# Altium PCB Music_Player.PcbDoc
Units mm, origin at the board's own origin, x right, y up, seen from the top; angles counter-clockwise.
Board outline 47 x 36.5 mm, 2 copper layers (Top Layer, Bottom Layer), stack 1.4 mm thick; 36 components, 24 nets, 164 pads, 63 vias.
Unrouted connection lines stored in the file: 41.
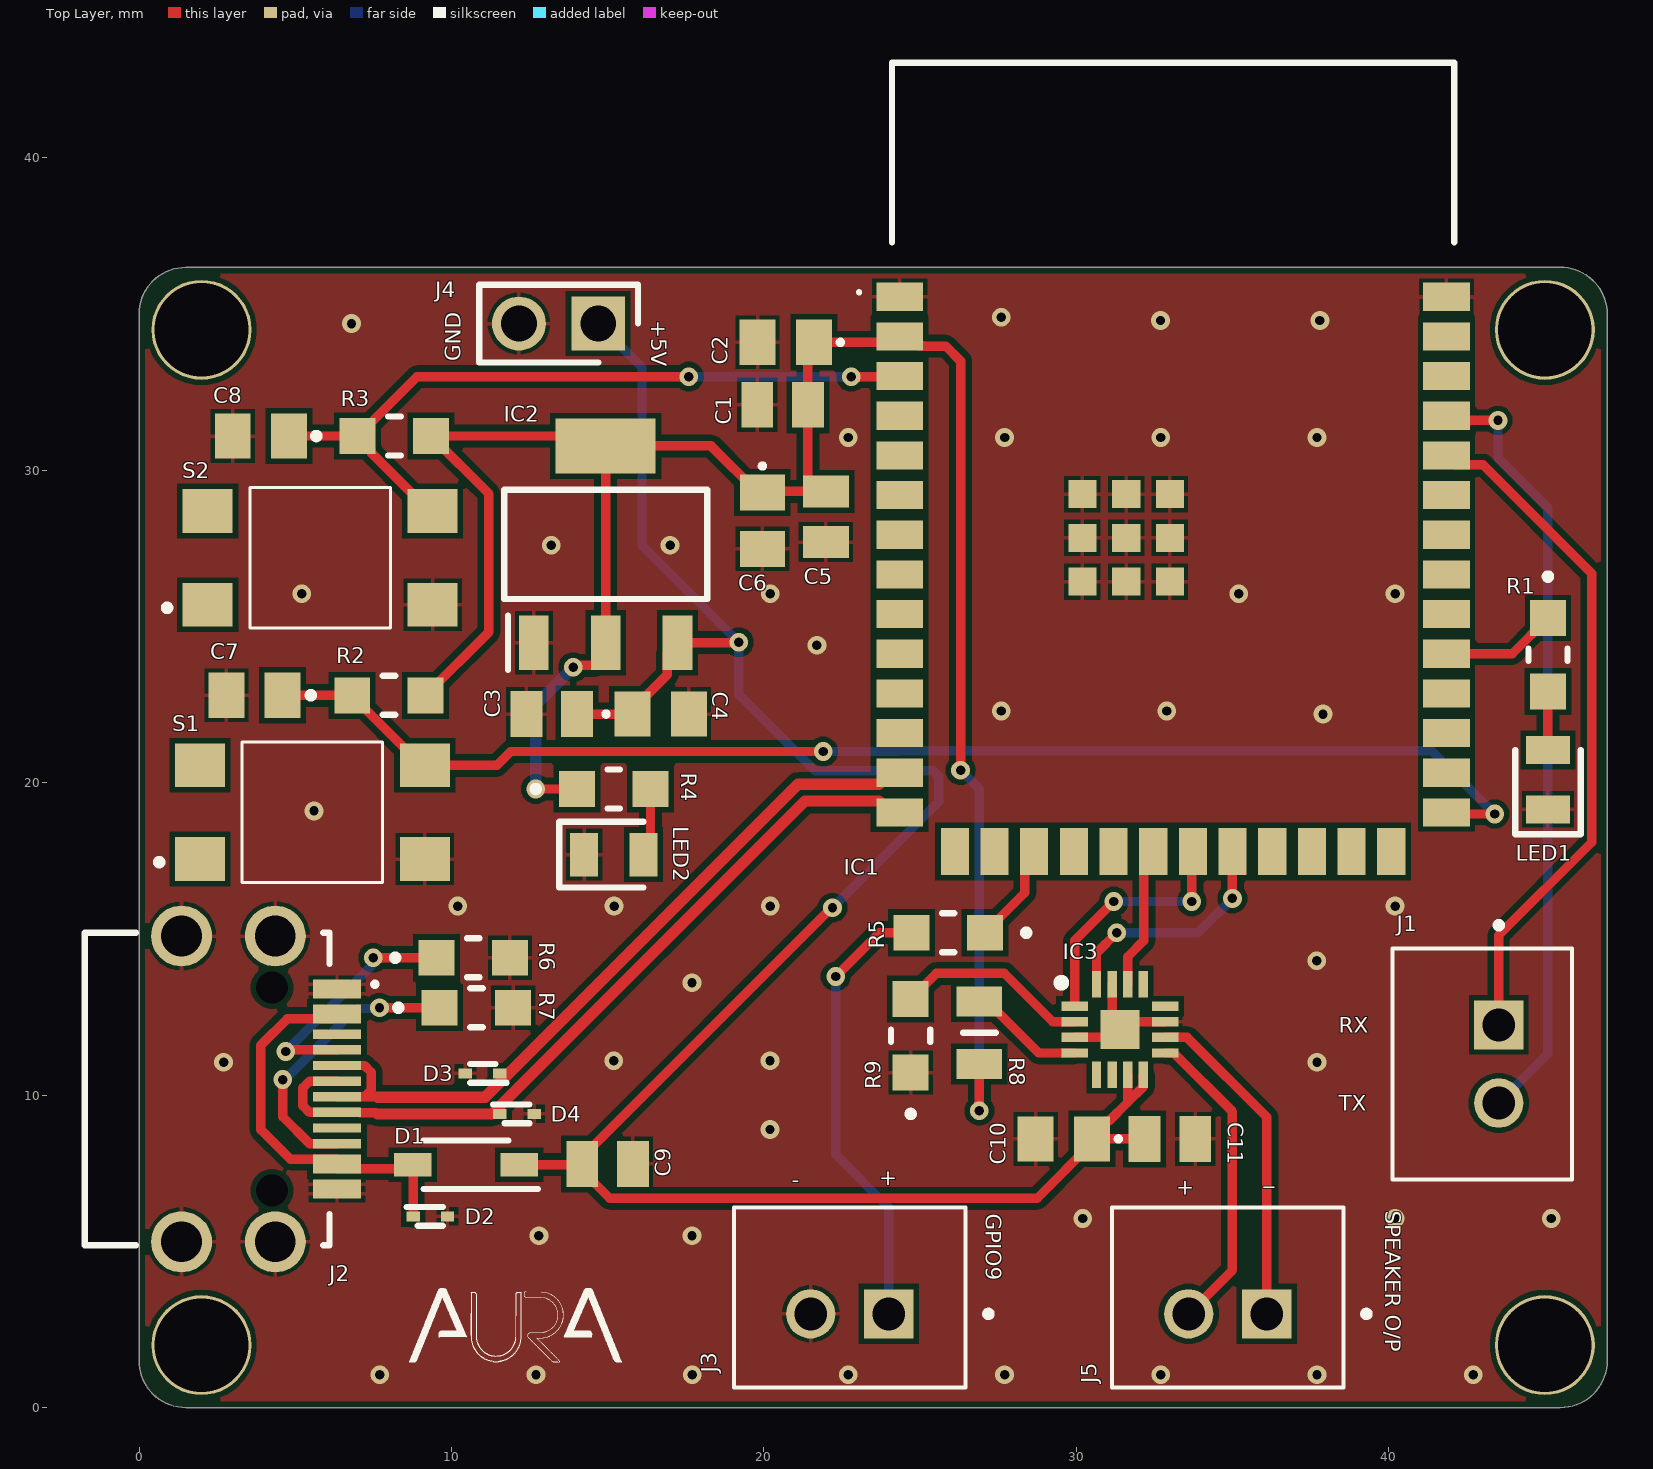
[diagram p0: Top Layer view]
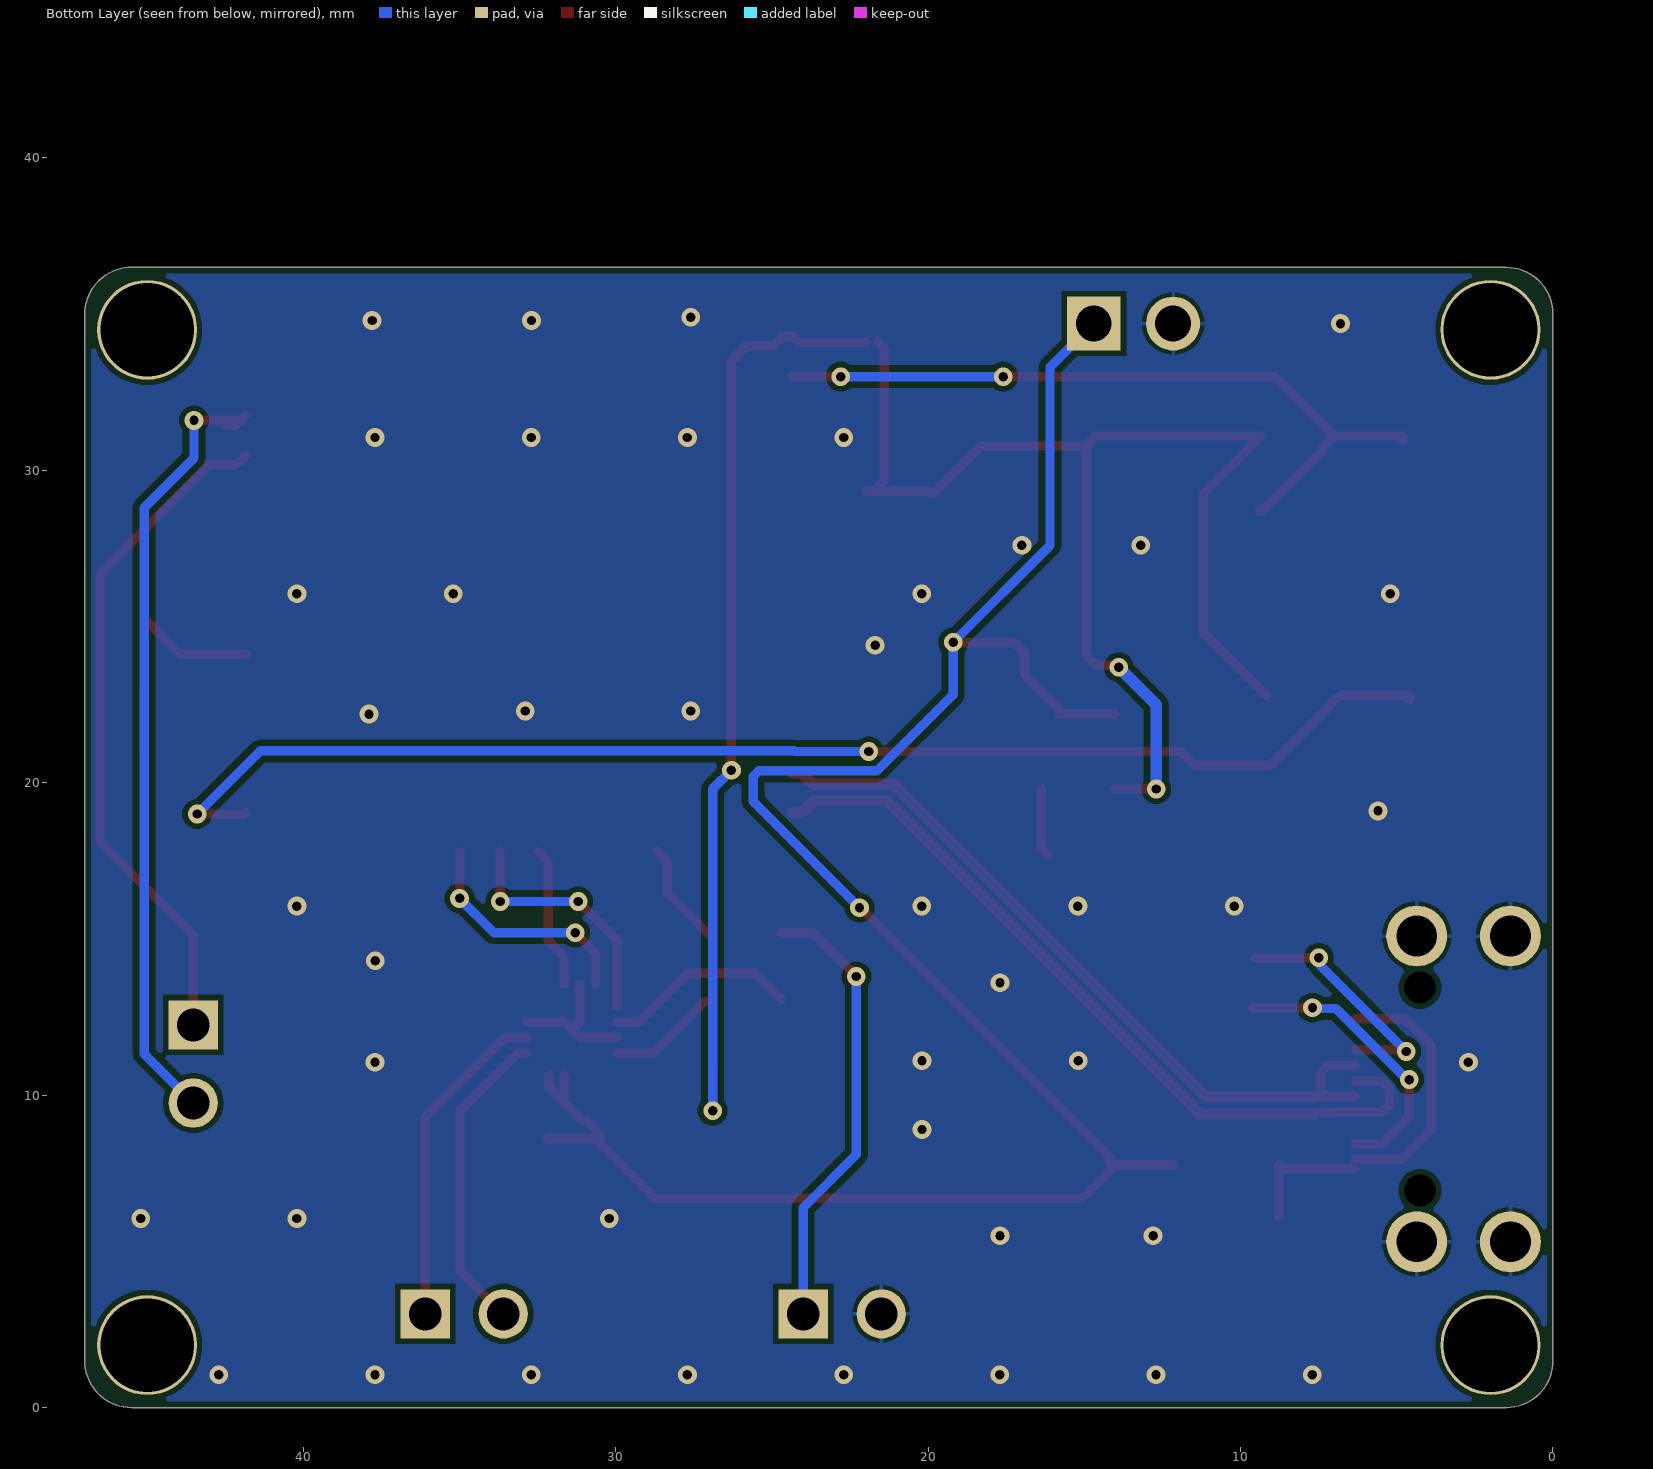
[diagram p1: Bottom Layer view, seen from below]
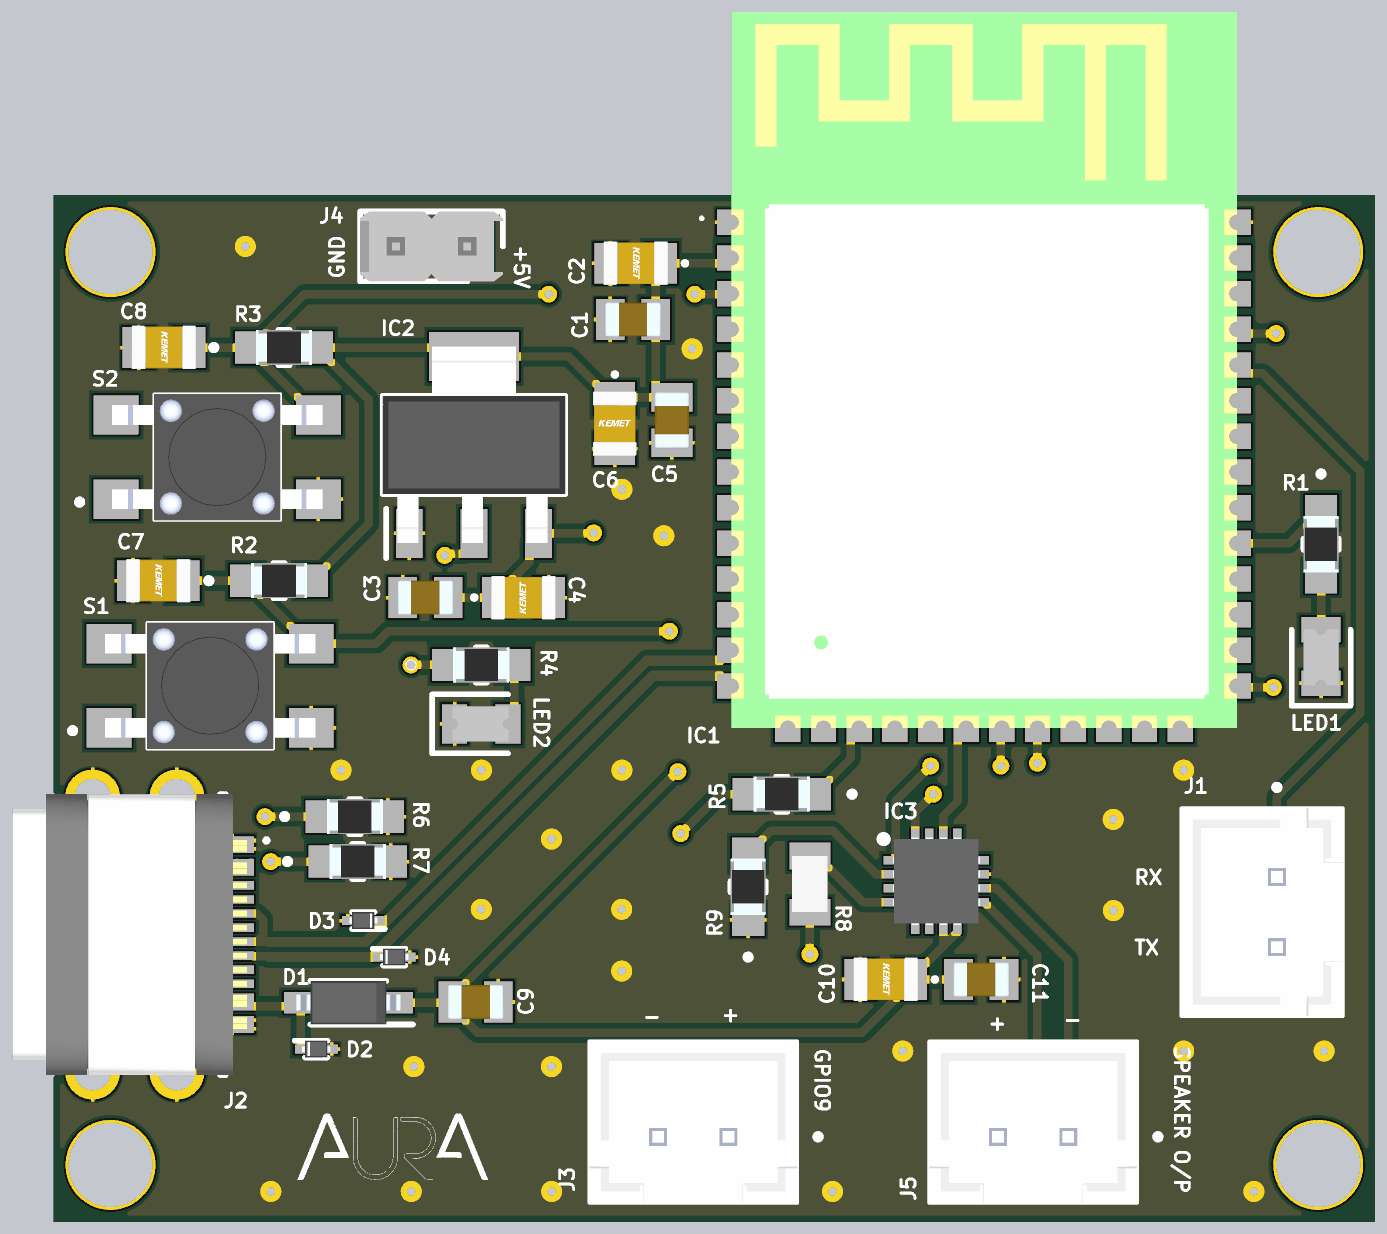
[diagram p2: 3D render of the assembled board from above, using the file's embedded part models]

## Layer stack, top to bottom
Top Solder: solder mask 0.1, SM-001, Dk 4
Top Layer: signal copper 0.15
Dielectric 1: dielectric 1.1, FR-4, Dk 4.8
Bottom Layer: signal copper 0.15
Bottom Solder: solder mask 0.1, SM-001, Dk 4

## Board outline
0,1.5 0,35 cw(c1.5,35) 1.5,36.5 45.5,36.5 cw(c45.5,35) 47,35 47,1.5 cw(c45.5,1.5) 45.5,0 1.5,0 cw(c1.5,1.5)

## Design rules (kind name [scope] priority, off if disabled: settings)
BoardOutlineClearance [All] p1: gap=0.2 ignorepadtopadclearanceinfootprint=FALSE
Clearance Clearance_1 [All] p1: gap=0.17 ignorepadtopadclearanceinfootprint=FALSE except(0.203: Track-Poly)
ComponentClearance [All] p1: gap=0.127 collisioncheckmode=3 verticalgap=0.127 showdistances=TRUE
DiffPairsRouting [All] p1: maxlimit=0.254 minlimit=0.127 mostfreqgap=0.17 toplayer_minwidth=0.127 toplayer_maxwidth=25.4 toplayer_prefwidth=0.363 bottomlayer_minwidth=0.127 bottomlayer_maxwidth=25.4 bottomlayer_prefwidth=0.363 maxuncoupledlength=12.7
Height [All] p1: minheight=0 maxheight=1816.048 prefheight=12.7
HoleSize [All] p1: absolutevalues=TRUE maxlimit=6.3 minlimit=0.3 maxpercent=80.000 minpercent=20.000
HoleToHoleClearance [All] p1: gap=0.25 allowstackedmicrovias=FALSE
MinimumAnnularRing [All] p1: minimumring=0.076
MinimumSolderMaskSliver [All] p1: minsoldermaskwidth=0
PlaneClearance [All] p1: clearance=0.127
PlaneConnect PlaneConnectPowerPads [InPadClass('PowerPads')] p1: planeconnectstyle=Direct reliefexpansion=0.508 reliefentries=4 reliefconductorwidth=0.254 reliefairgap=0.254
PlaneConnect [All] p2: pad.planeconnectstyle=Relief pad.reliefexpansion=0.3 pad.reliefentries=4 pad.reliefconductorwidth=0.127 pad.reliefairgap=0.127 via.planeconnectstyle=Direct via.reliefexpansion=0.3 via.reliefentries=4 via.reliefconductorwidth=0.127 via.reliefairgap=0.127
PolygonConnect PolygonConnectPowerPads [All vs (InPadClass('PowerPads'))] p1: connectstyle=Direct reliefconductorwidth=0.254 reliefentries=4 polygonreliefangle="90 Angle" airgapwidth=0.254
PolygonConnect [All] p2: thpad.connectstyle=Relief thpad.reliefconductorwidth=0.127 thpad.reliefentries=4 thpad.polygonreliefangle="90 Angle" thpad.airgapwidth=0.127 smdpad.connectstyle=Relief smdpad.reliefconductorwidth=0.127 smdpad.reliefentries=4 smdpad.polygonreliefangle="90 Angle" smdpad.airgapwidth=0.127 via.connectstyle=Direct via.reliefconductorwidth=0.127 via.reliefentries=4 via.polygonreliefangle="90 Angle" via.airgapwidth=0.127
RoutingVias [All] p1: holewidth=0.3 width=0.6 viastyle="Through Hole" minholewidth=0.3 minwidth=0.6 maxholewidth=0.6 maxwidth=6.6
SilkToSilkClearance [All] p1: silktosilkclearance=0
SilkToSolderMaskClearance [IsPad] p1: minsilkscreentomaskgap=0.04 clearancetoexposedcopper=TRUE
SolderMaskExpansion [All] p1: expansion=0.075 istentingtop=FALSE
Width [All] p1: maxlimit=0.363 minlimit=0.25 preferedwidth=0.3
20 further rules are at their usual default settings.

## Classes and differential pairs
component class ESP32: C1 C2 IC1 J1 LED1 R1
component class Amplifier: C10 C11 IC3 J5 R8 R9
component class Peripherals: C3 C4 C5 C6 C7 C8 C9 D1 D2 D3 D4 IC2 J2 J3 LED2 R2 R3 R4 R5 R6 R7 S1 S2

## Components (designator, comment, footprint, x,y, rotation, side; value= is the part's Value field where it differs from the comment)
C1 "22u/16V" CAPC2012X94N 20.6,32.1 r180 top
C2 "22u/16V" C0805 20.7,34.1 r180 top
C3 "22u/16V" CAPC2012X94N 13.21,22.2 r180 top
C4 "22u/16V" C0805 16.7,22.2 r0 top
C5 "22u/16V" CAPC2012X94N 21.987,28.517 r270 top
C6 "22u/16V" C0805 19.955,28.39 r270 top
C7 "22u/16V" C0805 3.7,22.8 r180 top
C8 "22u/16V" C0805 3.9,31.1 r180 top
C9 "22u/16V" CAPC2012X94N 15,7.8 r0 top
C10 "22u/16V" C0805 29.6,8.6 r180 top
C11 "22u/16V" CAPC2012X94N 33,8.6 r0 top
D1 "1N5819HW-7-F" SOD3716X145N 10.468,7.774 r180 top
D2 "CPDQ5V0-HF" SODFL1006X40N 9.325,6.123 r0 top
D3 "CPDQ5V0-HF" SODFL1006X40N 11,10.7 r180 top
D4 "CPDQ5V0-HF" SODFL1006X40N 12.1,9.4 r0 top
IC1 "ESP32-S3-WROOM-1-N8R2" ESP32S3WROOM1N8R2 33.1,30.3 r0 top
IC2 "LM1117MPX-3.3_NOPB" SOT230P700X180-4N 14.94,27.633 r90 top
IC3 "MAX98357AETE+T" QFN50P300X300X80-17N 31.4,12.1 r0 top
J1 "B2B-XH-A_(LF)(SN)" JST_B2B-XH-A_(LF)(SN) 43,11 r90 top
J2 "USB4730-GF-A" USB4730GFA 2.3,10.2 r270 top
J3 "B2B-XH-A_(LF)(SN)" JST_B2B-XH-A_(LF)(SN) 22.75,3.525 r0 top
J4 "22-28-4020" HDRV2W66P0X254_1X2_508X249X838P 14.7,34.7 r180 top
J5 "B2B-XH-A_(LF)(SN)" JST_B2B-XH-A_(LF)(SN) 34.85,3.525 r0 top
LED1 "HSMZ-C170" LEDC2012X90N 45.1,20.1 r90 top
LED2 "LSM0805463V" LEDC2012X90N 15.2,17.7 r0 top
R1 "100Ohm/125mW" ERA6AEB101V 45.1,24.1 r270 top
R2 "10k/125mW" ERA6AEB101V 8,22.8 r0 top
R3 "10k/125mW" ERA6AEB101V 8.175,31.1 r0 top
R4 "100Ohm" ERA6AEB101V 15.2,19.8 r0 top
R5 "100Ohm/125mW" ERA6AEB101V 25.9,15.2 r180 top
R6 "5k1/125mW" ERA6AEB101V 10.7,14.4 r0 top
R7 "5k1/125mW" ERA6AEB101V 10.8,12.8 r0 top
R8 "634k/125mW" RESC2012X50N 26.9,12 r90 top
R9 "100k/125mW" ERA6AEB101V 24.7,11.9 r90 top
S1 "TL3305BF100QG" TL3305BF160QG 5.547,19.06 r0 top
S2 "TL3305BF100QG" TL3305BF160QG 5.8,27.2 r0 top

## Footprints (in the part's own frame and the unit in brackets; to place one, negate y for a bottom-side part, rotate by r counter-clockwise, add the part's x,y. Pads: shape width x height; smd on the part's side, far side on the other; paste and mask are expansions set on the pad)
C0805 [mm]
  rect 1.15x1.45 smd: 1(-0.9,0) 2(0.9,0)
  silkscreen extent -1.8,-0.05 -1.7,0.05, body extent -1.15,-0.78 1.15,0.77, height 0.98
CAPC2012X94N [mm]
  rect 1.02x1.47 smd: 1(-0.81,0) 2(0.81,0)
  body extent -1,-0.63 1,0.63, height 0.94
ERA6AEB101V [mm]
  rect 1.15x1.15 smd: 1(-1.175,0) 2(1.175,0)
  silkscreen extent -2.6,-0.63 0.2,0.63, body extent -1,-0.63 1,0.63, height 0.5
ESP32S3WROOM1N8R2 [mm]
  rect 1.5x0.9 smd: 1(-8.75,5.26) 2(-8.75,3.99) 3(-8.75,2.72) 4(-8.75,1.45) 5(-8.75,0.18) 6(-8.75,-1.09) 7(-8.75,-2.36) 8(-8.75,-3.63) 9(-8.75,-4.9) 10(-8.75,-6.17) 11(-8.75,-7.44) 12(-8.75,-8.71) 13(-8.75,-9.98) 14(-8.75,-11.25) 27(8.75,-11.25) 28(8.75,-9.98) 29(8.75,-8.71) 30(8.75,-7.44) 31(8.75,-6.17) 32(8.75,-4.9) 33(8.75,-3.63) 34(8.75,-2.36) 35(8.75,-1.09) 36(8.75,0.18) 37(8.75,1.45) 38(8.75,2.72) 39(8.75,3.99) 40(8.75,5.26)
  rect 0.9x1.5 smd: 15(-6.985,-12.5) 16(-5.715,-12.5) 17(-4.445,-12.5) 18(-3.175,-12.5) 19(-1.905,-12.5) 20(-0.635,-12.5) 21(0.635,-12.5) 22(1.905,-12.5) 23(3.175,-12.5) 24(4.445,-12.5) 25(5.715,-12.5) 26(6.985,-12.5)
  rect 0.9x0.9 smd: 41(-1.5,-2.46) 42(-1.5,-1.06) 43(-2.9,-1.06) 44(-2.9,-2.46) 45(-2.9,-3.86) 46(-1.5,-3.86) 47(-0.1,-3.86) 48(-0.1,-2.46) 49(-0.1,-1.06)
  silkscreen extent -10.1,5.35 9,12.75, body extent -9,-12.75 9,12.75, height 2.7
HDRV2W66P0X254_1X2_508X249X838P [mm]
  rect 1.725x1.725 hole 1.15: 1(0,0)
  round 1.725 hole 1.15: 2(2.54,0)
  silkscreen extent -1.27,-1.24 3.81,1.24, body extent -1.27,-1.24 3.81,1.24, height 8.38
JST_B2B-XH-A_(LF)(SN) [mm]
  rect 1.575x1.575 / inner round 1.575 / far side rect 1.575x1.575 hole 1.05: 1(1.25,-0.525)
  round 1.575 hole 1.05: 2(-1.25,-0.525)
  silkscreen extent -3.7,-2.88 4.54,2.88, body extent -3.7,-2.88 3.7,2.88, height 7
LEDC2012X90N [mm]
  rect 0.9x1.4 smd: 1(-0.95,0) 2(0.95,0)
  silkscreen extent -1.75,-1.05 0.95,1.05, body extent -1.03,-0.63 0.97,0.63, height 0.8
QFN50P300X300X80-17N [mm]
  rect 0.85x0.3 smd: 1(-1.45,0.75) 2(-1.45,0.25) 3(-1.45,-0.25) 4(-1.45,-0.75) 9(1.45,-0.75) 10(1.45,-0.25) 11(1.45,0.25) 12(1.45,0.75)
  rect 0.3x0.85 smd: 5(-0.75,-1.45) 6(-0.25,-1.45) 7(0.25,-1.45) 8(0.75,-1.45) 13(0.75,1.45) 14(0.25,1.45) 15(-0.25,1.45) 16(-0.75,1.45)
  rect 1.25x1.25 smd: 17(0,0)
  silkscreen extent -2,1.38 -1.75,1.62, body extent -1.55,-1.55 1.55,1.55, height 0.8
RESC2012X50N [mm]
  rect 0.95x1.45 smd: 1(-1,0) 2(1,0)
  silkscreen extent 0,-0.53 0,0.53, body extent -1,-0.62 1,0.63, height 0.45
SOD3716X145N [mm]
  rect 1.2x0.75 smd: 1(-1.7,0) 2(1.7,0)
  silkscreen extent -2.3,-0.77 1.35,0.77, body extent -1.85,-0.77 1.85,0.77, height 1.45
SODFL1006X40N [mm]
  rect 0.43x0.32 smd: 1(-0.55,0) 2(0.55,0)
  silkscreen extent -0.76,-0.3 0.4,0.3, body extent -0.5,-0.3 0.5,0.3, height 0.4
SOT230P700X180-4N [mm]
  rect 1.75x0.95 smd: 1(-3.15,2.3) 2(-3.15,0) 3(-3.15,-2.3)
  rect 1.75x3.2 smd: 4(3.15,0)
  silkscreen extent -4.03,-3.25 1.75,3.25, body extent -3.5,-3.25 3.5,3.25, height 1.68
TL3305BF160QG [mm]
  rect 1.6x1.4 smd: 1(-3.6,-1.5) 2(3.6,-1.5) 3(-3.6,1.5) 4(3.6,1.5)
  silkscreen extent -5,-2.25 2.25,2.25, body extent -3.75,-2.25 3.75,2.25, height 4.9
USB4730GFA [mm]
  rect 0.3x1.55 smd: A1(-3.35,4.038) A4(-2.55,4.038) A5(-1.25,4.038) A6(-0.25,4.038) A7(0.25,4.038) A8(1.25,4.038) A9(2.55,4.038) A12(3.35,4.038) B1(3.05,4.038) B4(2.25,4.038) B5(1.75,4.038) B6(0.75,4.038) B7(-0.75,4.038) B8(-1.75,4.038) B9(-2.25,4.038) B12(-3.05,4.038)
  round 1.95 hole 1.3: MH1(-4.895,2.063) MH2(4.895,2.063) MH3(4.895,-0.938) MH4(-4.895,-0.938)
  round 0.51 hole 1.02 unplated: MH5(-3.25,1.963) MH6(3.25,1.963)
  silkscreen extent -5,-4.04 5,5.3, body extent -5,-3.79 5,4.57, height 4.68

## Part data
C1 C3 C5 C9 C11: library part 0805YC106KAT2A, "Multilayer Ceramic Capacitors MLCC - SMD/SMT KGM21AR71C106KU NEW GLOBAL PN 16V 10uF X A 581-KGM21AR71C106KU", Manufacturer_Name="Kyocera AVX", Mouser Part Number=581-0805YC106KAT2A, Arrow Part Number=0805YC106KAT2A, Arrow Price/Stock=https://www.arrow.com/en/products/0805yc106kat2a/avx?region=nac, Datasheet Link=https://www.mouser.fr/datasheet/2/40/AVX_X7RDielectric_777024-1853642.pdf, Height=0.94mm, Manufacturer_Part_Number=0805YC106KAT2A, Mouser Price/Stock=https://www.mouser.co.uk/ProductDetail/KYOCERA-AVX/0805YC106KAT2A?qs=3HJ2avRr9PKwMzeRMZhF2g%3D%3D
C2 C4 C6 C7 C8 C10: library part C0805X104K4RACAUTO, "Multilayer Ceramic Capacitors MLCC - SMD/SMT 16V 0.1uF X7R 0805 10% Flex AEC-Q200", Manufacturer_Name=KEMET, Mouser Part Number=80-C0805X104K4RAUTO, Arrow Part Number=C0805X104K4RACAUTO, Arrow Price/Stock=https://www.arrow.com/en/products/c0805x104k4racauto/kemet-corporation?utm_currency=USD&region=nac, Datasheet Link=https://content.kemet.com/datasheets/KEM_C1078_X7R_FT-CAP_AUTO_SMD.pdf, Height=1.1mm, Manufacturer_Part_Number=C0805X104K4RACAUTO, Mouser Price/Stock=https://www.mouser.co.uk/ProductDetail/KEMET/C0805X104K4RACAUTO?qs=PqoDHHvF64%2FAA39kqwjnIA%3D%3D
D1: "Schottky Diodes & Rectifiers Vr/40V Io/1A T/R", Manufacturer_Name="Diodes Incorporated", Mouser Part Number=621-1N5819HW-F, Arrow Part Number=1N5819HW-7-F, Arrow Price/Stock=https://www.arrow.com/en/products/1n5819hw-7-f/diodes-incorporated?region=nac, Datasheet Link=https://www.diodes.com//assets/Datasheets/1N5819HW.pdf, Height=1.45mm, Manufacturer_Part_Number=1N5819HW-7-F, Mouser Price/Stock=https://www.mouser.co.uk/ProductDetail/Diodes-Incorporated/1N5819HW-7-F?qs=NQ47qNm99eDyWTEd07miYA%3D%3D
D2 D3 D4: "ESD Protection Diodes / TVS Diodes SMD ESD Diode 5V Bi-Direction", Manufacturer_Name="Comchip Technology", Mouser Part Number=750-CPDQ5V0-HF, Arrow Part Number=CPDQ5V0-HF, Arrow Price/Stock=https://www.arrow.com/en/products/cpdq5v0-hf/comchip-technology?region=nac, Datasheet Link=https://datasheet.datasheetarchive.com/originals/distributors/Datasheets-DGA26/1842344.pdf, Height=0.4mm, Manufacturer_Part_Number=CPDQ5V0-HF, Mouser Price/Stock=https://www.mouser.co.uk/ProductDetail/Comchip-Technology/CPDQ5V0-HF?qs=ccyN4P6STah119k8k5VB0Q%3D%3D
IC1: "Integrated Circuit", Manufacturer_Name="Espressif Systems", Mouser Part Number=356-ESP32-S3WRM1N8R2, Datasheet Link=https://www.mouser.com/catalog/specsheets/Espressif_ESP32_S3_WROOM_1_1U_Preliminary.pdf, Height=3.25mm, Manufacturer_Part_Number=ESP32-S3-WROOM-1-N8R2, Mouser Price/Stock=https://www.mouser.co.uk/ProductDetail/Espressif-Systems/ESP32-S3-WROOM-1-N8R2?qs=Wj%2FVkw3K%252BMCC1Ha9x85iJA%3D%3D
IC2: "LDO Voltage Regulators 800MA LDO LINEAR REG", Arrow Part Number=LM1117MPX-3.3/NOPB, Manufacturer_Name="Texas Instruments", Mouser Part Number=926-LM1117MPX3.3NOPB, Arrow Price/Stock=https://www.arrow.com/en/products/lm1117mpx-3.3nopb/texas-instruments?utm_currency=USD&region=nac, Datasheet Link=http://www.ti.com/lit/ds/symlink/lm1117.pdf, Height=1.8mm, Manufacturer_Part_Number=LM1117MPX-3.3/NOPB, Mouser Price/Stock=https://www.mouser.co.uk/ProductDetail/Texas-Instruments/LM1117MPX-3.3-NOPB?qs=X1J7HmVL2ZHRbBIxXi4utg%3D%3D
IC3: "Audio Amplifiers Digital Input Class D Amplifier", Manufacturer_Name="Analog Devices", Mouser Part Number=700-MAX98357AETE+T, Arrow Part Number=MAX98357AETE+T, Arrow Price/Stock=https://www.arrow.com/en/products/max98357aetet/analog-devices?region=nac, Datasheet Link=https://datasheets.maximintegrated.com/en/ds/MAX98357A-MAX98357B.pdf, Height=0.8mm, Manufacturer_Part_Number=MAX98357AETE+T, Mouser Price/Stock=https://www.mouser.co.uk/ProductDetail/Analog-Devices-Maxim-Integrated/MAX98357AETE%2bT?qs=AAveGqk956HhNpoJjF5x2g%3D%3D
J1 J3 J5: "Connector Header Through Hole 2 position 0.098 (2.50mm)", Package=None, Check_prices=https://www.snapeda.com/parts/B2B-XH-A%20(LF)(SN)/JST+Sales+America+Inc./view-part/?ref=eda, MF="JST Sales", MP="B2B-XH-A (LF)(SN)", SnapEDA_Link=https://www.snapeda.com/parts/B2B-XH-A%20(LF)(SN)/JST+Sales+America+Inc./view-part/?ref=snap
J2: "USB Connectors USB2.0 TypeC Recpt. CONNECTOR ONLY GF, 16P Horz T.Mt. SMT, IP67", Manufacturer_Name="GCT (GLOBAL CONNECTOR TECHNOLOGY)", Mouser Part Number=640-USB4730GFA, Datasheet Link=https://gct.co/files/drawings/usb4730.pdf, Height=4.81mm, Manufacturer_Part_Number=USB4730-GF-A, Mouser Price/Stock=https://www.mouser.co.uk/ProductDetail/GCT/USB4730-GF-A?qs=Z%252BL2brAPG1KuvvEznGJ6ZQ%3D%3D
J4: "Connector", Manufacturer_Name=Molex, Mouser Part Number=538-22-28-4020, Datasheet Link=https://www.mouser.com/datasheet/2/276/0022284020_PCB_HEADERS-228358.pdf, Height=8.38mm, Manufacturer_Part_Number=22-28-4020, Mouser Price/Stock=https://www.mouser.co.uk/ProductDetail/Molex/22-28-4020?qs=d9fIA1aNikTifpx8PDmVSA%3D%3D
LED1: "Standard LEDs - SMD AlInGaP2 Red 2 Red", Manufacturer_Name="Avago Technologies", Mouser Part Number=630-HSMZ-C170, Datasheet Link=https://docs.broadcom.com/docs/AV02-0112EN, Height=0.9mm, Manufacturer_Part_Number=HSMZ-C170, Mouser Price/Stock=https://www.mouser.co.uk/ProductDetail/Broadcom-Avago/HSMZ-C170?qs=YDL0qNrpDT5yNxU7mHRBEQ%3D%3D
LED2: "Standard LEDs - SMD 0805 3V 100mcd Blue", Manufacturer_Name="Visual Communications Company", Mouser Part Number=593-LSM0805463V, Arrow Part Number=LSM0805463V, Arrow Price/Stock=https://www.arrow.com/en/products/lsm0805463v/visual-communications?region=nac, Datasheet Link=https://www.arrow.com/en/products/lsm0805463v/visual-communications, Height=0.9mm, Manufacturer_Part_Number=LSM0805463V, Mouser Price/Stock=https://www.mouser.co.uk/ProductDetail/VCC/LSM0805463V?qs=T3oQrply3y%252B92KGe6UJ6%252BA%3D%3D
R1 R5: library part ERA-6AED560V, "Thin Film Resistors - SMD 0805 56ohms 25ppm 0.5% AEC-Q200", Manufacturer_Name=Panasonic, Datasheet Link=https://industrial.panasonic.com/cdbs/www-data/pdf/RDM0000/AOA0000C307.pdf, Height=0.6mm, Manufacturer_Part_Number=ERA-6AED560V
R2 R3: library part ERA-6APB103V, "Thin Film Resistors - SMD 0805 10Kohm 0.1% 15ppm AEC-Q200", Manufacturer_Name=Panasonic, Mouser Part Number=667-ERA-6APB103V, Datasheet Link=https://industrial.panasonic.com/cdbs/www-data/pdf/RDM0000/AOA0000C307.pdf, Height=0.6mm, Manufacturer_Part_Number=ERA-6APB103V, Mouser Price/Stock=https://www.mouser.co.uk/ProductDetail/Panasonic/ERA-6APB103V?qs=ob%252BdNz2%252BYEhhgEYA52%2FHJA%3D%3D
R4: library part ERA-6AHD120V, "Thin Film Resistors - SMD 0805 12ohms 50ppm 0.5% AEC-Q200", Manufacturer_Name=Panasonic, Mouser Part Number=667-ERA-6AHD120V, Datasheet Link=https://industrial.panasonic.com/cdbs/www-data/pdf/RDM0000/AOA0000C307.pdf, Height=0.6mm, Manufacturer_Part_Number=ERA-6AHD120V, Mouser Price/Stock=https://www.mouser.co.uk/ProductDetail/Panasonic/ERA-6AHD120V?qs=MNPzkKEzRtR4QU3SwMNEXg%3D%3D
R6 R7: library part ERA-6AED512V, "Thin Film Resistors - SMD 0805 5100ohms 25ppm 0.5% AEC-Q200", Manufacturer_Name=Panasonic, Mouser Part Number=667-ERA-6AED512V, Arrow Part Number=ERA-6AED512V, Arrow Price/Stock=https://www.arrow.com/en/products/era-6aed512v/panasonic?region=nac, Datasheet Link=https://industrial.panasonic.com/cdbs/www-data/pdf/RDM0000/AOA0000C307.pdf, Height=0.6mm, Manufacturer_Part_Number=ERA-6AED512V, Mouser Price/Stock=https://www.mouser.co.uk/ProductDetail/Panasonic/ERA-6AED512V?qs=MNPzkKEzRtSyMhgZIjuV%252BA%3D%3D
R8: library part CRCW0805634KFKEA, "Thick Film Resistors - SMD 1/8watt 634Kohms 1%", Manufacturer_Name=Vishay, Mouser Part Number=71-CRCW0805634KFKEA, Datasheet Link=http://www.vishay.com/docs/20035/dcrcwe3.pdf, Height=0.5mm, Manufacturer_Part_Number=CRCW0805634KFKEA, Mouser Price/Stock=https://www.mouser.com/Search/ProductDetail.aspx?qs=EhwKGB4UJflfbl5wVdh81Q%3d%3d
R9: library part ERA-6AED104V, "Thin Film Resistors - SMD 0805 100Kohms 25ppm 0.5% AEC-Q200", Manufacturer_Name=Panasonic, Mouser Part Number=667-ERA-6AED104V, Datasheet Link=https://industrial.panasonic.com/cdbs/www-data/pdf/RDM0000/AOA0000C307.pdf, Height=0.6mm, Manufacturer_Part_Number=ERA-6AED104V, Mouser Price/Stock=https://www.mouser.com/Search/Refine.aspx?Keyword=667-ERA-6AED104V
S1 S2: "Tactile Switches TACT, 50mA, SPST-NO, Surface Mount", Manufacturer_Name=E-Switch, Datasheet Link=https://www.e-switch.com/wp-content/uploads/2024/08/TL3305.pdf, Manufacturer_Part_Number=TL3305BF100QG

## Free pads (board coordinates)
  round 3.2 hole 3: 1(2,2) 2(2,34.5) 3(45,34.5) 4(45,2)

## Via types
v1: diameter 0.6, hole 0.3, Top Layer to Bottom Layer, 63 vias

## Nets (pads, with @x,y where several pads share a name; then routed paths per layer and width w, separated by ;. In a path a pad name is that pad's centre, name@x,y a point inside that pad or via, vN(x,y) a via of type N, cw(c..) or ccw(c..) an arc to the next point about the centre after c; other vN are vias at no path point)
+3V3: C1.1 C2.1 C5.1 C6.1 IC1.2 IC2.2 IC2.4 R2.2 R3.2 R4.1 R8.1 | length 72.4
  Top Layer w0.3: R2.2 11.2,24.825 11.2,29.25 R3.2 14.623,31.1 IC2.4 ; v1(12.7,19.8) R4.1 ; v1(13.9,23.7) 13.981,23.7 14.039,23.758 14.615,23.758 14.94,24.083 IC2.2 IC2.4 ; C2.1 21.41,33.91 C1.1 21.41,29.687 C5.1@21.77,29.327 ; C5.1 C5.1@21.77,29.327 ; C2.1@22,34.1 24.16,34.1 IC1.2 24.65,34.29 24.95,33.99 25.114,33.99 25.126,33.979 25.821,33.979 26.3,33.5 v1(26.3,20.4) ; v1(26.9,9.5) R8.1 ; IC2.4 18.312,30.783 19.805,29.29 C6.1 19.992,29.327 C5.1@21.77,29.327
  Bottom Layer w0.3: v1(26.3,20.4) 26.9,19.8 v1(26.9,9.5)
  Bottom Layer w0.363: v1(12.7,19.8) 12.7,22.5 v1(13.9,23.7)
+5V: C3.1 C4.1 C9.1 C10.1 C11.1 D1.1 IC2.3 IC3.7 IC3.8 J4.1 | length 69.8
  Top Layer w0.3: D1.1 C9.1@14.164,7.774 ; C3.1 C4.1 15.8,22.35 16.915,23.465 16.915,24.158 IC2.3 19.183,24.483 v1(19.2,24.5) ; C9.1@14.19,7.575 15.065,6.7 28.75,6.7 C10.1@30.5,8.45 ; C9.1 14.19,8.025 22.165,16 v1(22.2,16) ; IC3.7 31.65,9.775 ; C11.1@32.15,8.64 C11.1 C10.1 30.5,8.75 30.925,9.175 31.05,9.175 31.65,9.775 ; IC3.8 32.15,10.275 31.65,9.775
  Bottom Layer w0.3: J4.1 16.1,33.3 16.1,27.6 v1(19.2,24.5) 19.2,22.823 21.643,20.38 25.424,20.38 25.6,20.204 25.6,19.4 v1(22.2,16)
GND: C1.2 C2.2 C3.2 C4.2 C5.2 C6.2 C7.2 C8.2 C9.2 C10.2 C11.2 D2.2 D3.2 D4.2 IC1.1 IC1.40 IC1.41 IC1.42 IC1.43 IC1.44 IC1.45 IC1.46 IC1.47 IC1.48 IC1.49 IC2.1 IC3.3 IC3.11 IC3.15 IC3.17 J2.A1 J2.A12 J2.B1 J2.B12 J2.MH1 J2.MH2 J2.MH3 J2.MH4 J3.2 J4.2 LED1.1 LED2.1 R6.2 R7.2 R9.1 S1.2 S2.2 | length 4.7
  Top Layer w0.3: IC3.3 31.15,11.85 IC3.17 ; IC3.15 31.15,12.35 IC3.17 ; IC3.11 31.65,12.35 IC3.17
  other v1: 7.707,1.054 12.707,1.054 17.707,1.054 22.707,1.054 27.707,1.054 32.707,1.054 37.707,1.054 42.707,1.054 12.8,5.5 17.7,5.5 30.207,6.054 40.207,6.054 45.207,6.054 20.2,8.9 2.707,11.054 37.707,11.054 15.2,11.1 20.2,11.1 17.7,13.6 37.7,14.3 10.207,16.054 15.207,16.054 20.207,16.054 40.207,16.054 5.6,19.1 37.9,22.2 27.6,22.3 32.9,22.3 21.7,24.4 5.207,26.054 20.207,26.054 35.207,26.054 40.207,26.054 13.2,27.6 17,27.6 22.707,31.054 27.707,31.054 32.707,31.054 37.707,31.054 6.8,34.7 32.7,34.8 37.8,34.8 27.6,34.9
NetC7_1: C7.1 IC1.27 R2.1 S1.4 | length 42.5
  Top Layer w0.3: C7.1@4.6,22.65 C7.1 R2.1 7.25,22.375 7.25,22.357 9.047,20.56 S1.4 11.46,20.56 11.9,21 v1(21.9,21) ; IC1.27 41.9,19 v1(43.4,19)
  Bottom Layer w0.3: v1(21.9,21) 24.288,21 24.308,21.02 41.38,21.02 v1(43.4,19)
NetC8_1: C8.1 IC1.3 R3.1 S2.4 | length 23.9
  Top Layer w0.3: C8.1@4.8,30.95 C8.1 R3.1 ; S2.4 9.3,28.7 7.425,30.575 7.425,30.675 R3.1 ; v1(17.6,33) 8.9,33 R3.1 ; v1(22.8,33) 24.33,33 IC1.3
  Bottom Layer w0.3: v1(17.6,33) v1(22.8,33)
NetD1_2: D1.2 D2.1 J2.A4 J2.A9 J2.B4 J2.B9 | length 12.5
  Top Layer w0.3: J2.A9 8.644,7.65 D1.2 8.775,7.767 D2.1 ; J2.B4 4.85,7.95 3.903,8.897 3.903,11.603 4.75,12.45 J2.B9
NetIC1_17: IC1.17 R5.1 | length 3.3
  Top Layer w0.3: R5.1 28.355,16.48 28.355,17.5 IC1.17
NetIC1_20: IC1.20 IC3.14 | length 4.6
  Top Layer w0.3: IC3.14 31.65,14.434 32.165,14.949 32.165,17.5 IC1.20
NetIC1_21: IC1.21 IC3.1 | length 8
  Top Layer w0.3: IC3.1 29.95,14.95 v1(31.2,16.2) ; v1(33.7,16.2) 33.7,17.765 IC1.21
  Bottom Layer w0.3: v1(31.2,16.2) v1(33.7,16.2)
NetIC1_22: IC1.22 IC3.16 | length 7.6
  Top Layer w0.3: IC3.16 30.65,14.55 v1(31.3,15.2) ; v1(35,16.3) 35,17.795 IC1.22
  Bottom Layer w0.3: v1(31.3,15.2) 33.9,15.2 v1(35,16.3)
NetIC1_31: IC1.31 R1.1 | length 3.7
  Top Layer w0.3: IC1.31 43.955,24.13 R1.1
NetIC1_36: IC1.36 J1.1 | length 21.9
  Top Layer w0.3: IC1.36 42.15,30.18 43.02,30.18 46.5,26.7 46.5,18.1 43.525,15.125 J1.1
NetIC1_37: IC1.37 J1.2 | length 25.2
  Top Layer w0.3: IC1.37 42,31.6 v1(43.5,31.6) ; IC1.37@42.15,31.45 IC1.37@42.472,31.45
  Bottom Layer w0.3: v1(43.5,31.6) 43.5,30.4 45.1,28.8 45.1,11.325 J1.2
NetIC3_2: IC3.2 R9.2 | length 6.2
  Top Layer w0.3: R9.2 25.125,13.5 25.525,13.9 27.7,13.9 29.25,12.35 IC3.2
NetIC3_4: IC3.4 R8.2 | length 3.7
  Top Layer w0.3: R8.2 27.15,13 28.8,11.35 IC3.4
NetIC3_9: IC3.9 J5.2 | length 10
  Top Layer w0.3: IC3.9 33.125,11.35 35,9.475 35,4.4 J5.2
NetIC3_10: IC3.10 J5.1 | length 10.6
  Top Layer w0.3: IC3.10 33.55,11.85 36.1,9.3 J5.1
NetJ2_A5: J2.A5 R6.1 | length 7.8
  Top Layer w0.3: v1(4.7,11.4) 4.75,11.45 J2.A5 ; v1(7.5,14.4) R6.1
  Bottom Layer w0.3: v1(4.7,11.4) 7.443,14.143 7.443,14.343 v1(7.5,14.4)
NetJ2_B5: J2.B5 R7.1 | length 9.3
  Top Layer w0.3: v1(4.6,10.5) 4.6,9.31 5.46,8.45 J2.B5 ; v1(7.7,12.8) R7.1
  Bottom Layer w0.3: v1(4.6,10.5) 4.677,10.5 6.95,12.773 7.673,12.773 v1(7.7,12.8)
NetJ3_1: J3.1 R5.2 | length 14.5
  Top Layer w0.3: v1(22.3,13.8) 23.7,15.2 R5.2
  Bottom Layer w0.3: v1(22.3,13.8) 22.3,8.1 24,6.4 J3.1
NetLED1_2: LED1.2 R1.2 | length 1.9
  Top Layer w0.3: LED1.2 R1.2
NetLED2_2: LED2.2 R4.2 | length 2.2
  Top Layer w0.3: LED2.2 16.375,17.925 R4.2
USB_D_N: D3.1 IC1.13 J2.A7 J2.B7 | length 24.4
  Top Layer w0.3: J2.A7 7.216,9.95 ; J2.B7 7.216,10.95 7.433,10.733 7.433,10.167 7.216,9.95 ; 7.637,9.933 7.621,9.95 7.216,9.95
  Top Layer w0.363: 7.637,9.933 11.079,9.933 21.098,19.952 23.682,19.952 24.05,20.32 IC1.13
USB_D_P: D4.1 IC1.14 J2.A6 J2.B6 | length 25.2
  Top Layer w0.3: J2.B6 5.46,9.45 5.243,9.667 5.243,10.233 5.46,10.45 J2.A6 ; J2.B6@6.353,9.45 7.051,9.45 7.066,9.435 7.572,9.435 7.622,9.385
  Top Layer w0.363: 7.637,9.4 11.3,9.4 21.318,19.418 23.682,19.418 24.05,19.05 IC1.14
pads on no net: IC1.4 IC1.5 IC1.6 IC1.7 IC1.8 IC1.9 IC1.10 IC1.11 IC1.12 IC1.15 IC1.16 IC1.18 IC1.19 IC1.23 IC1.24 IC1.25 IC1.26 IC1.28 IC1.29 IC1.30 IC1.32 IC1.33 IC1.34 IC1.35 IC1.38 IC1.39 IC3.5 IC3.6 IC3.12 IC3.13 J2.A8 J2.B8 J2.MH5 J2.MH6 S1.1 S1.3 S2.1 S2.3

## Polygon pours and split planes (outlines as drawn)
GND on Bottom Layer "GND_L02_P001" (solid, remove dead copper, pour order 1): 0,1.5 0,35 cw(c1.5,35) 1.5,36.5 45.5,36.5 cw(c45.5,35) 47,35 47,1.5 cw(c45.5,1.5) 45.5,0 1.5,0 cw(c1.5,1.5)
GND on Top Layer "GND_L01_P000" (solid, remove dead copper, pour order 0): 0,1.5 0,35 cw(c1.5,35) 1.5,36.5 45.5,36.5 cw(c45.5,35) 47,35 47,1.5 cw(c45.5,1.5) 45.5,0 1.5,0 cw(c1.5,1.5)

## Silkscreen, mask and mechanical layers (free items; w line width, h text height)
Top Overlay:
  drawing of 4 lines, arcs and shapes, not listed
  text "+5V" at 16.4,34.8 h0.5 r270
  text "GND" at 10.3,33.5 h0.5 r90
  text "RX" at 38.4,12 h0.5
  text "TX" at 38.4,9.5 h0.5
  text "_" at 36,7.183 h0.5
  text "+" at 23.7,7.117 h0.5
  text "-" at 20.9,7.05 h0.5
  text "+" at 33.2,6.817 h0.5
  text "SPEAKER O/P" at 39.9,6.3 h0.5 r270
  text "GPIO9" at 27.1,6.2 h0.5 r270
Mechanical 1:
  the board outline again, w0.1